# EAGLE board Laser_Tag_Dip_New (EAGLE 6.0)
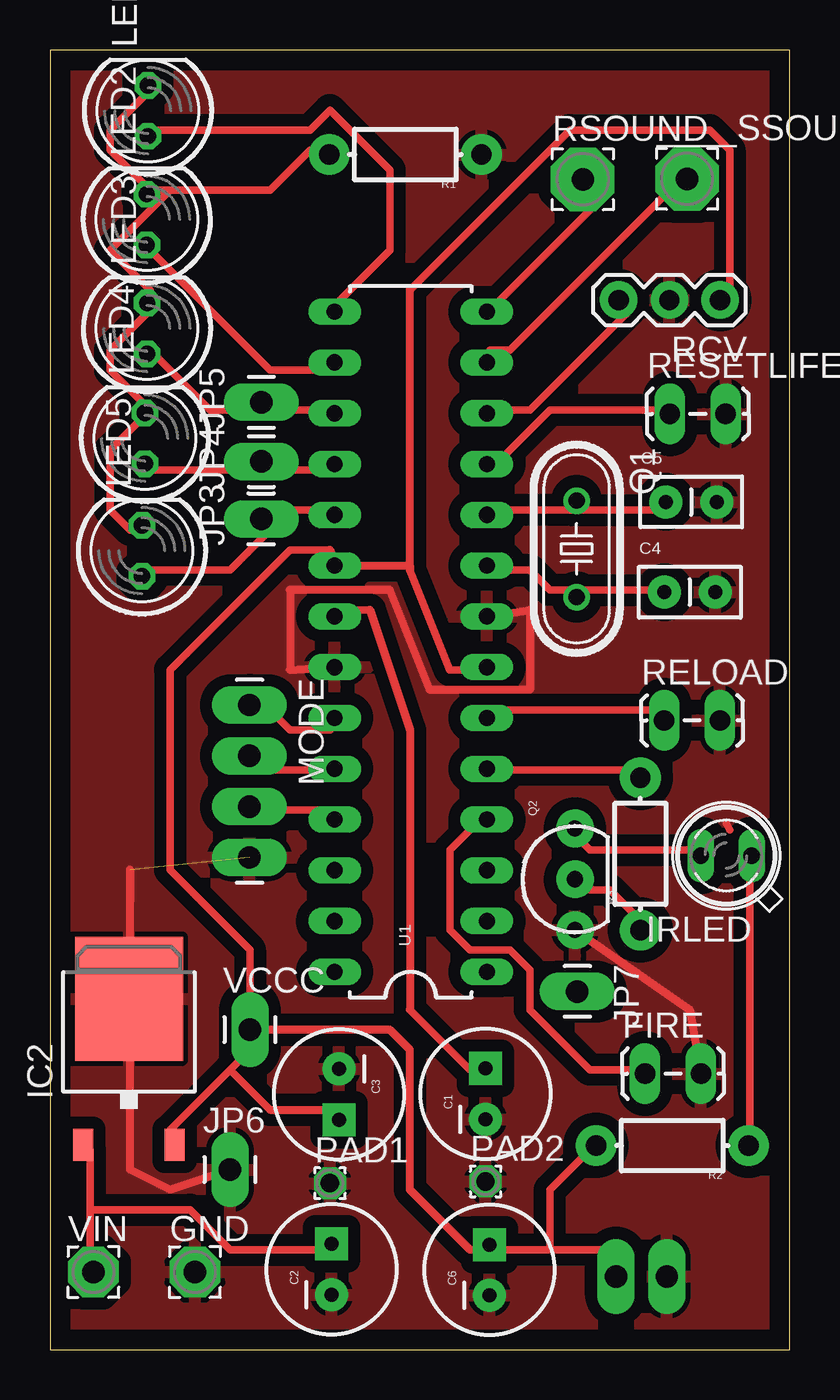
[diagram p0: board, top side]
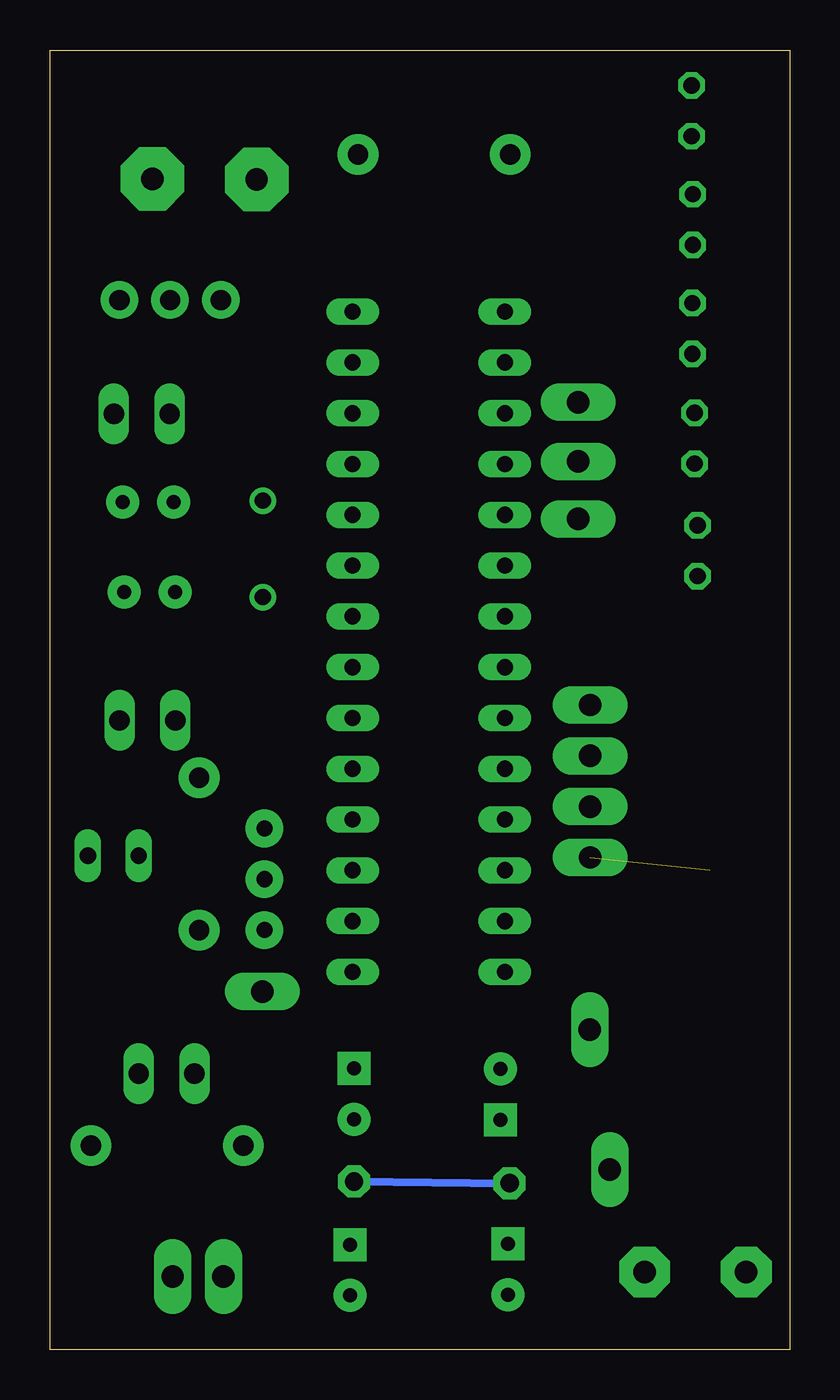
[diagram p1: board, bottom side, seen from below]

Size 37 x 65 mm. Coordinates in mm from the lower left corner, seen from the top.
Outline: 0,0 37,0 37,65 0,65 0,0
Copper layers (1*16): Top 0.035mm / dielectric 1.5mm / Bottom 0.035mm
Design rules: minimum track width 10mil, minimum drill 24mil, track to track 8mil, track to pad 8mil, pad to pad 8mil, via to via 8mil, smd to smd 8mil, copper to edge 40mil, drill to drill 8mil, minimum pad ring 10mil, minimum via ring 8mil, stop-mask expansion 4mil, vias tented up to drill 0mil, thermal gap 10mil
Net classes: 0 default: width 0.381 mm, drill 0.203 mm, clearance 0.254 mm

## Footprints (pad centres in the part's own frame; a part is rotated, then mirrored left to right if it is on the bottom)
3,17/1,1 = drill 1.118 pad 3.175 octagon: 1 0,0
CPOL-RADIAL-100UF-25V = drill 0.7 pad 1.651 square: 1 1.27,0 | drill 0.7 pad 1.651: 2 -1.27,0
CAP-PTH-SMALLEZ = drill 0.7 pad 1.651: 1 0,0; 2 2.54,0
1X02_LOCK_LONGPADS = drill 1.016 long: 1 -0.127,0; 2 2.667,0
2,54/1,1 = drill 1.118 pad 2.54 octagon: 1 0,0
TO252 = smd 1 x 1.6: 1 -2.28,-4.8; 2 2.28,-4.8 | smd 5.4 x 6.2: 3 0,2.5
SFH482 = drill 0.813 long: A -1.27,0; K 1.27,0
1X01_LONGPAD = drill 1.118 pad 1.88 long: 1 0,0
LED5MM = drill 0.813 octagon: A -1.27,0; K 1.27,0
1X04_LONGPADS = drill 1.118 pad 1.88 long: 1 0,0; 2 2.54,0; 3 5.08,0; 4 7.62,0
1,6/0,9 = drill 0.914 pad 1.6 octagon: 1 0,0
HC49/S = drill 0.813: 1 -2.413,0; 2 2.413,0
TO-92-AMMO = drill 0.813 pad 1.88: 1 -2.54,0; 2 0,0; 3 2.54,0
AXIAL-0.3-KIT = drill 1.016 pad 2.032: P$1 -3.81,0; P$2 3.81,0
1X03 = drill 1.016 pad 1.88: 1 0,0; 2 2.54,0; 3 5.08,0
DIL28-3 = drill 0.813 long: 1 -16.51,-3.81; 2 -13.97,-3.81; 3 -11.43,-3.81; 4 -8.89,-3.81; 5 -6.35,-3.81; 6 -3.81,-3.81; 7 -1.27,-3.81; 8 1.27,-3.81; 9 3.81,-3.81; 10 6.35,-3.81; 11 8.89,-3.81; 12 11.43,-3.81; 13 13.97,-3.81; 14 16.51,-3.81; 15 16.51,3.81; 16 13.97,3.81; 17 11.43,3.81; 18 8.89,3.81; 19 6.35,3.81; 20 3.81,3.81; 21 1.27,3.81; 22 -1.27,3.81; 23 -3.81,3.81; 24 -6.35,3.81; 25 -8.89,3.81; 26 -11.43,3.81; 27 -13.97,3.81; 28 -16.51,3.81
1X02_LONGPADS = drill 1.118 pad 1.88 long: 1 0,0; 2 2.54,0

## Placement (x,y rotation side)
____SSOUND  SHOOT  [3,17/1,1]  31.87,58.56 0 top
C1  [CPOL-RADIAL-100UF-25V]  21.79,12.79 90 top
C2  [CPOL-RADIAL-100UF-25V]  14.09,4.01 90 top
C3  [CPOL-RADIAL-100UF-25V]  14.46,12.76 270 top
C4  [CAP-PTH-SMALLEZ]  30.74,37.88 0 top
C5  [CAP-PTH-SMALLEZ]  30.81,42.4 0 top
C6  [CPOL-RADIAL-100UF-25V]  21.98,3.98 90 top
FIRE  [1X02_LOCK_LONGPADS]  29.9,13.8 0 top
GND  GND PAD  [2,54/1,1]  7.25,3.88 0 top
IC2  7805DT  [TO252]  3.95,15.05 0 top
IRLED  SFH482  [SFH482]  33.84,24.7 180 top
JP3  13  [1X01_LONGPAD]  10.57,41.55 90 top
JP4  12  [1X01_LONGPAD]  10.57,44.42 90 top
JP5  11  [1X01_LONGPAD]  10.57,47.38 90 top
JP6  M01PTH_LONGPAD  [1X01_LONGPAD]  9,9 0 top
JP7  M01PTH_LONGPAD  [1X01_LONGPAD]  26.38,17.91 270 top
LED1  [LED5MM]  4.9,61.96 90 top
LED2  [LED5MM]  4.84,56.52 90 top
LED3  [LED5MM]  4.86,51.07 90 top
LED4  [LED5MM]  4.75,45.58 90 top
LED5  [LED5MM]  4.6,39.95 90 top
MODE  [1X04_LONGPADS]  9.98,32.23 270 top
PAD1  WIREPAD1,6/0,9  [1,6/0,9]  14,8.32 0 top
PAD2  WIREPAD1,6/0,9  [1,6/0,9]  21.79,8.4 0 top
Q1  [HC49/S]  26.35,40.05 270 top
Q2  [TO-92-AMMO]  26.27,23.52 90 top
R1  [AXIAL-0.3-KIT]  17.78,59.77 180 top
R2  [AXIAL-0.3-KIT]  31.13,10.2 180 top
R3  [AXIAL-0.3-KIT]  29.54,24.79 90 top
RCV  IR RCVR  [1X03]  33.53,52.49 180 top
RELOAD  [1X02_LOCK_LONGPADS]  30.85,31.46 0 top
RESETLIFE  [1X02_LOCK_LONGPADS]  31.14,46.8 0 top
RSOUND  RELOAD  [3,17/1,1]  26.66,58.53 0 top
U1  ATMEGA328P_PDIP  [DIL28-3]  18.05,35.4 90 top
VCCC  5  [1X01_LONGPAD]  10,16 0 top
VIN  Vin PAD  [2,54/1,1]  2.17,3.88 0 top
VOUT  [1X02_LONGPADS]  28.32,3.66 0 top

## Library data of the parts
____SSOUND GND PAD1 PAD2 RSOUND VIN = wirepad
C1-C6 = SparkFun-Capacitors
FIRE JP3-JP7 MODE RCV RELOAD RESETLIFE VCCC VOUT = SparkFun-Connectors
IC2 = linear
IRLED LED1-LED5 = led
Q1 = crystal; OC_FARNELL: 1667008; OC_NEWARK: unknown
Q2 = SparkFun-DiscreteSemi
R1 = SparkFun-Resistors
R2 R3 = SparkFun-Passives
U1 = SparkFun-DigitalIC

## Nets
CONNECT: FIRE.1 U1.4
GND: C1.2 C2.2 C3.2 C4.2 C5.2 C6.2 FIRE.2 GND.1 IC2.3 JP6.1 MODE.4 PAD1.1 PAD2.1 Q2.1 R1.P$1 RCV.2 RELOAD.2 RESETLIFE.2 U1.8 U1.22 VOUT.2
N$1: C2.1 IC2.1 VIN.1
N$2: C1.1 U1.21
N$3: LED1.A U1.15
N$4: C5.1 Q1.1 U1.10
N$5: LED2.A U1.16
N$6: C4.1 Q1.2 U1.9
N$7: JP5.1 LED3.A U1.17
N$8: JP4.1 LED4.A U1.18
N$9: JP3.1 LED5.A U1.19
N$10: LED1.K LED2.K LED3.K LED4.K LED5.K R1.P$2
N$11: IRLED.K Q2.3
N$12: IRLED.A R2.P$1
N$13: RELOAD.1 U1.6
N$14: RESETLIFE.1 U1.11
N$15: RCV.3 U1.12
N$16: Q2.2 R3.P$1
N$17: MODE.1 U1.23
N$18: MODE.2 U1.24
N$19: MODE.3 U1.25
N$20: R3.P$2 U1.5
N$21: U1.1
RELOADSOUND: RSOUND.1 U1.14
RESETWIRE: JP7.1
SHOOTSOUND: ____SSOUND.1 U1.13
VCC: C3.1 C6.1 IC2.2 R2.P$2 RCV.1 U1.7 U1.20 VCCC.1 VOUT.1

## Tracks (layer width: path | path; a pad name or v marks a point on that pad's centre or on a via)
CONNECT
  Top 0.381: U1.4 21,26 20,25 20,21 21,20 23,20 24,19 24,17 27,14 30,14 FIRE.1
GND  (1 unrouted)
  Top 0.381: 34,26 33.84,26.32
  Top 0.406: Q2.1 32,17 FIRE.2 | U1.8 24,37 24,33 19,33 17,38 12,38 12,34 U1.22 | JP6.1 6,8 4,9 4,24 IC2.3
  Bottom 0.406: PAD2.1 PAD1.1
  pour Top (isolate 0.61): 0,65 37,65 37,0 0,0
N$1
  Top 0.381: 2,7 2,4 VIN.1 | 2,7 2,10 IC2.1 | 2,7 7,7 9,5 14,5 C2.1
N$2
  Top 0.381: 16,37 15,37 U1.21 | 18,17 21,14 C1.1
  Top 0.406: 16,37 18,31 18,17
N$3
  Top 0.381: LED1.A 5,61 13,61 14,62 17,59 17,55 14,52 U1.15
N$4
  Top 0.381: 26,42 22,42 U1.10 | 26,42 31,42 C5.1 | 26,42 Q1.1
N$5
  Top 0.381: LED2.A 5,55 11,49 14,49 U1.16
N$6
  Top 0.381: 26,38 25,38 24,39 22,39 U1.9 | 26,38 30,38 C4.1 | 26,38 Q1.2
N$7
  Top 0.381: LED3.A 5,50 8,47 10,47 JP5.1 11,47 14,47 U1.17
N$8
  Top 0.381: LED4.A 5,44 10,44 JP4.1 11,44 14,44 U1.18
N$9
  Top 0.381: LED5.A 5,39 9,39 11,41 JP3.1 11,42 14,42 U1.19
N$10
  Top 0.381: 5,47 3,45 3,42 4,41 LED5.K | 5,47 3,49 3,50 5,52 LED3.K 5,53 3,55 6,58 | 5,47 LED4.K | 6,58 11,58 13,60 R1.P$2 | 6,58 5,58 | 5,58 3,60 3,61 5,63 LED1.K | 5,58 LED2.K
N$11
  Top 0.381: IRLED.K 32,25 27,25 26,26 Q2.3
N$12
  Top 0.381: IRLED.A 35,24 35,11 R2.P$1
N$13
  Top 0.381: U1.6 22,32 30,32 RELOAD.1
N$14
  Top 0.381: U1.11 22,44 25,47 31,47 RESETLIFE.1
N$15
  Top 0.381: U1.12 22,47 24,47 29,52 RCV.3
N$16
  Top 0.381: Q2.2 27,23 28,23 30,21 R3.P$1
N$17
  Top 0.381: U1.23 14,31 12,31 10,33 MODE.1
N$18
  Top 0.381: U1.24 14,29 10,29 MODE.2
N$19
  Top 0.381: U1.25 14,27 10,27 MODE.3
N$20
  Top 0.381: U1.5 22,29 29,29 R3.P$2
RELOADSOUND
  Top 0.381: U1.14 22,52 27,57 27,58 RSOUND.1
SHOOTSOUND
  Top 0.381: U1.13 22,50 23,50 31,58 ____SSOUND.1
VCC
  Top 0.381: 9,14 10,15 VCCC.1 10,20 6,24 6,34 12,40 14,40 | 9,14 6,11 IC2.2 | 9,14 11,12 | 25,5 28,5 29,4 VOUT.1 | 25,5 22,5 | 25,5 25,8 27,10 R2.P$2 | 22,5 21,5 | 22,5 C6.1 | 20,34 21,34 U1.7 | 18,53 26,61 33,61 34,60 34,53 RCV.1
  Top 0.406: 21,5 18,8 18,15 17,16 VCCC.1 | 11,12 14,12 C3.1 | 20,34 18,39 18,39.21 | 14,40 U1.20 18,39.21 | 18,39.21 18,53